# Altium PCB PCB_Quectel_M25.PcbDoc (part 2 of 2)
Units mm, origin at the board's own origin, x right, y up, seen from the top; angles counter-clockwise.
Board outline 88.9 x 63.5 mm, 2 copper layers (Top Layer, Bottom Layer), stack 1.67 mm thick; 94 components, 52 nets, 369 pads, 65 vias.
Unrouted connection lines stored in the file: 1.
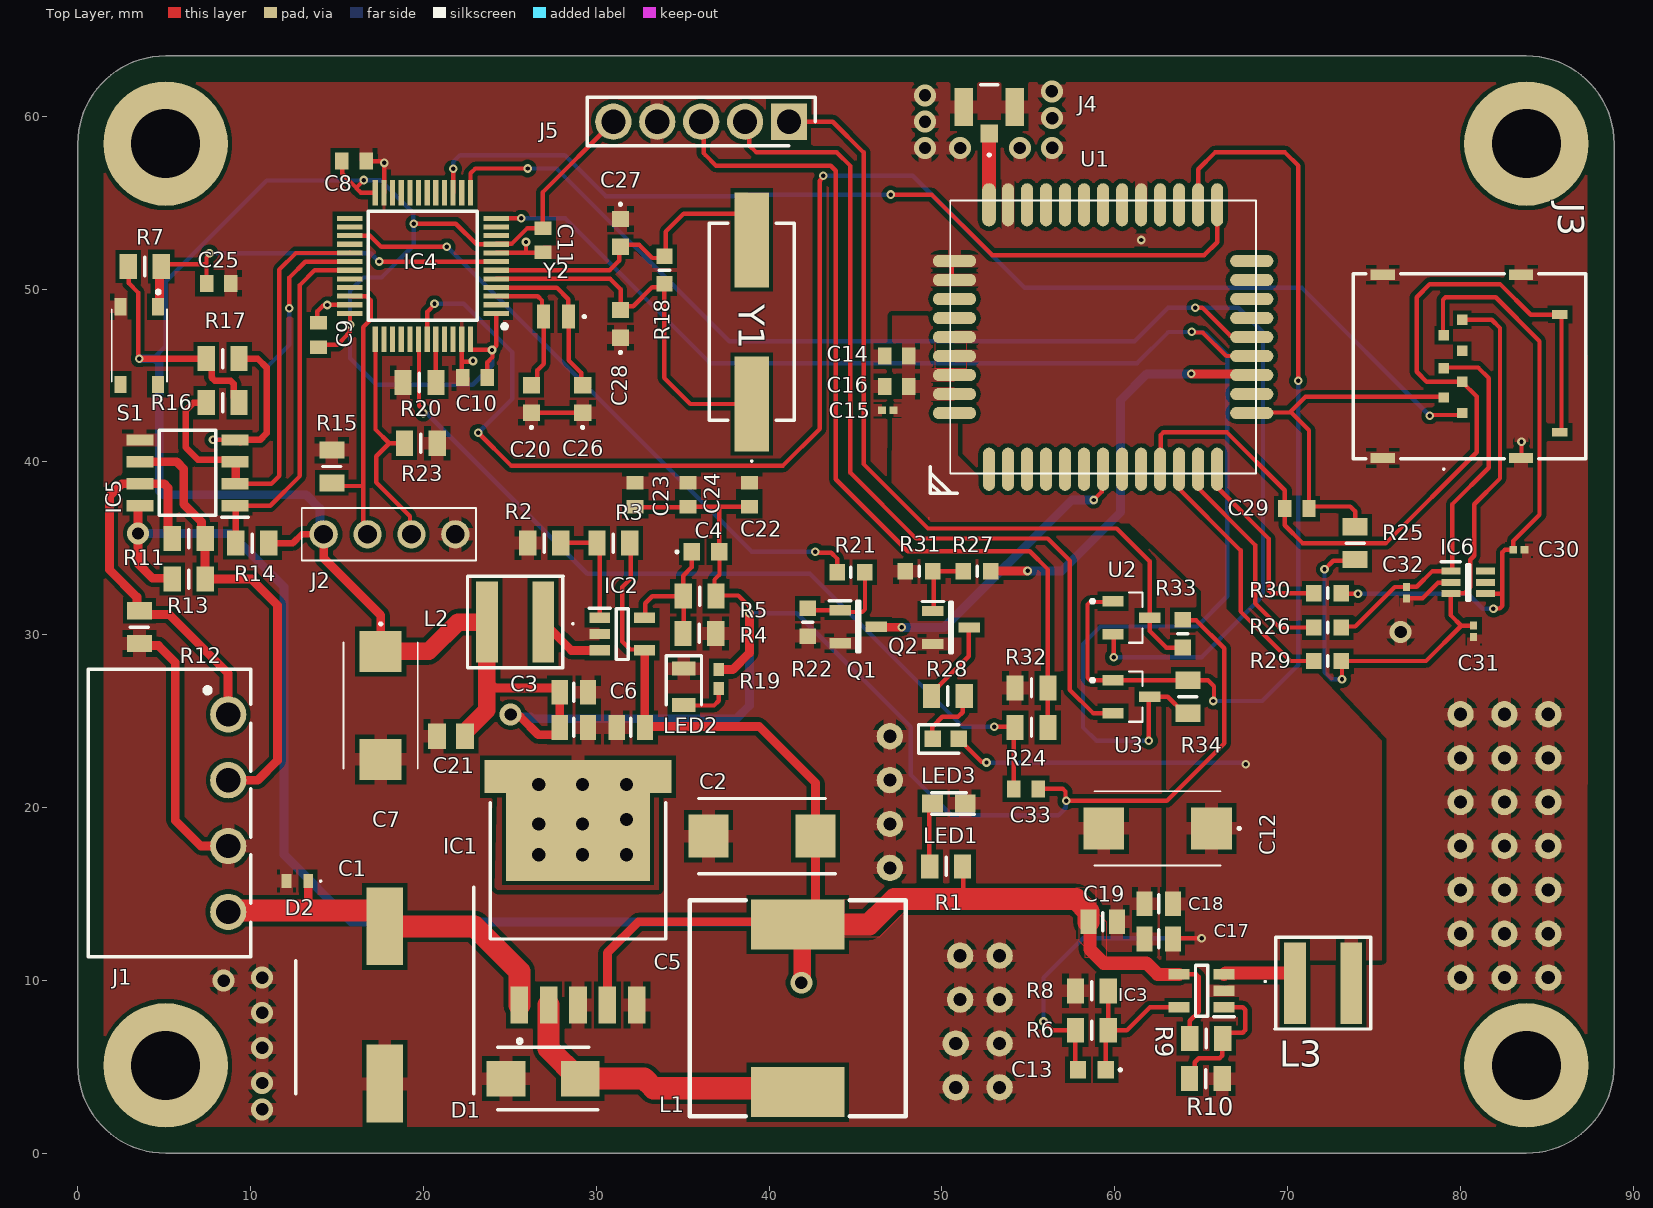
[diagram p0: Top Layer view]

## Via types
v1: diameter 0.5, hole 0.254, Top Layer to Bottom Layer, tented both sides, 47 vias
v2: diameter 1.27, hole 0.711, Top Layer to Bottom Layer, tented both sides, 18 vias

## Nets (pads, with @x,y where several pads share a name; then routed paths per layer and width w, separated by ;. In a path a pad name is that pad's centre, name@x,y a point inside that pad or via, vN(x,y) a via of type N, cw(c..) or ccw(c..) an arc to the next point about the centre after c; other vN are vias at no path point) (continued)
SIMDT: (continued)
  Top Layer w0.254: IC4.43 20.214,48.682 20.639,49.107 v1(20.639,49.15) ; v1(23.177,41.685) 25.071,39.791 40.807,39.791 42.926,41.91 42.926,56.271 43.092,56.437 43.092,56.51 v1(43.139,56.557) ; v1(78.232,42.672) 78.279,42.719 79.963,42.719 80.01,42.672 80.1,42.762 J3.CD1
  Bottom Layer w0.254: v1(20.639,49.15) 22.334,49.15 25.146,46.339 25.146,43.654 v1(23.177,41.685) ; v1(43.139,56.557) 48.309,56.557 54.796,50.07 70.834,50.07 v1(78.232,42.672)
SWDCLK: IC4.37 J2.2 R23.2 | length 14.4
  Top Layer w0.254: IC4.37 17.223,47.099 17.223,45.931 ; 17.223,45.93 17.223,41.877 18.019,41.081 ; R23.2 18.019,41.081 ; J2.2 19.223,35.895 19.223,36.864 17.272,38.815 17.272,40.333 18.019,41.081
  Bottom Layer w0.254: J2.2@19.177,36.5 19.177,35.941 J2.2
SWDIO: IC4.34 J2.3 R15.2 | length 17
  Top Layer w0.254: R15.2 14.878,38.608 16.51,38.608 ; IC4.34 15.732,49.59 16.704,49.59 16.942,49.352 16.942,48.235 16.51,47.803 16.51,38.608 ; J2.3 16.51,36.068 16.51,38.608
TX_EN: IC4.29 IC5.2 IC5.3 R16.1 | length 27
  Top Layer w0.254: IC5.2 11.204,38.737 11.659,39.192 11.659,51.13 12.618,52.09 15.721,52.09 IC4.29 ; IC5.3@9.098,39.982 IC5.3
  Top Layer w0.381: R16.1 7.414,43.416 6.673,43.416 6.239,42.982 6.239,40.839 6.946,40.132 IC5.3@8.948,40.132
  Top Layer w0.508: IC5.2 9.098,38.762 9.144,38.808 9.144,39.936 IC5.3@9.098,39.982
V_EXT: R34.2 U1.24 U2.1 U3.1 | length 57.4
  Top Layer w0.254: U2.1 59.859,31.897 58.574,31.897 58.425,31.748 58.425,27.515 58.574,27.366 U3.1 R34.2 ; R34.2@64.241,27.361 65.399,27.361 65.745,27.016 65.745,26.209 v1(65.707,26.17) ; U1.24 64.827,56.934 65.805,57.912 69.85,57.912 70.612,57.15 v1(70.612,44.704)
  Bottom Layer w0.254: v1(65.707,26.17) 68.537,26.17 70.612,28.245 v1(70.612,44.704)
VB_STM32: C3.2 C4.2 C5.2 C7.1 C8.2 C9.2 C10.2 C11.2 C21.2 C22.2 C23.2 C24.2 C33.2 IC4.1 IC4.9 IC4.24 IC4.36 IC4.48 J2.4 J5.5 L2.2 R5.2 R7.2 R14.2 R16.2 R17.2 R19.2 R33.2 | length 226.1
  Top Layer w0.254: R7.2 2.943,51.29 2.943,50.351 3.488,49.806 3.488,46.216 3.509,46.195 3.509,46.021 v1(3.556,45.974) ; C9.2 14.051,46.772 15.015,46.772 15.342,47.098 15.342,47.114 15.737,47.509 v1@15.737,47.858 ; C8.2@15.295,57.386 15.295,56.677 16.094,55.877 16.119,55.877 v1(16.553,56.311) ; IC4.36 15.748,48.574 v1(15.748,47.936) v1@15.748,47.869 ; 16.101,55.857 16.38,55.578 17.191,55.578 17.197,55.583 IC4.24 ; v1(19.438,53.788) 21.874,53.788 23.072,52.59 24.197,52.59 IC4.9 24.224,52.617 25.099,52.617 26.014,53.532 C11.2@26.894,53.532 ; IC4.48 22.714,46.52 22.737,46.497 22.881,46.497 22.886,46.491 23.957,46.491 v1(23.969,46.479) ; C10.2 23.687,45.758 23.996,46.066 23.996,46.452 23.991,46.457 24.015,46.457 24.015,46.526 24.218,46.728 IC4.1@24.218,48.595 ; C11.2 C11.2@26.894,53.532 ; J5.5 26.894,55.596 C11.2@26.894,53.532 ; C23.2 32.273,37.378 35.284,37.378 C24.2 37.122,37.4 ; C4.2 37.122,37.4 ; C4.2@37.128,34.798 37.128,33.48 36.841,33.193 36.841,32.323 R5.2 36.967,32.275 38.222,32.275 38.862,31.635 v1(38.862,31.242) ; C22.2 37.122,37.4 ; C33.2 57.003,21.082 57.151,20.933 57.151,20.435 v1(57.198,20.388) 63.015,20.388 66.342,23.715 66.342,29.213 64.724,30.831 63.967,30.831 R33.2
  Top Layer w0.381: v1(3.556,45.974) R17.2 7.742,45.664 7.742,44.89 7.927,44.704 8.837,44.704 9.023,44.518 9.023,43.743 R16.2 ; R14.2 12.446,35.306 12.954,35.814 J2.4
  Top Layer w0.508: J2.4 14.224,34.422 17.526,31.12 C7.1 ; 23.674,27.38 24.13,26.924 27.666,26.924 27.882,26.708 C3.2 C5.2@27.882,24.838 ; v2(25.049,25.385) 25.195,25.239 25.615,25.239 26.644,24.21 27.666,24.21 27.882,24.426 C5.2 ; R19.2 37.892,27.982 38.862,28.952 v1(38.862,31.242)
  Top Layer w1.016: C7.1@17.575,29.047 20.311,29.047 21.998,30.734 L2.2 ; C21.2 22.4,24.355 23.674,25.629 23.674,27.38 L2.2@23.674,30.662
  Bottom Layer w0.254: 4.361,45.974 5.08,46.693 5.08,50.433 10.934,56.287 16.529,56.287 v1(16.553,56.311) 17.508,56.311 19.4,54.419 19.4,53.826 v1(19.438,53.788) 19.438,52.534 17.577,50.673 16.51,50.673 15.748,49.911 v1(15.748,47.936) 15.748,45.999 17.286,44.461 22.854,44.461 23.991,45.598 23.991,46.457 v1(23.969,46.479) ; v1@38.87,31.25 41.605,31.25 48.205,24.65 48.205,21.89 50.537,19.558 56.739,19.558 57.168,19.987 57.168,20.358 v1(57.198,20.388)
  Bottom Layer w0.508: v1(3.556,45.974) 4.361,45.974 4.486,45.974 4.709,45.751 4.709,38.323 4.932,38.1 13.208,38.1 14.008,37.3 14.008,36.03 J2.4 ; v2(25.049,25.385) 25.195,25.239 25.653,25.239 26.192,25.239 26.284,25.147 38.101,25.147 38.862,25.908 v1(38.862,31.242)
pads on no net: IC1.7 IC1.8 IC4.2 IC4.10 IC4.11 IC4.14 IC4.16 IC4.17 IC4.18 IC4.19 IC4.20 IC4.21 IC4.22 IC4.25 IC4.26 IC4.28 IC4.32 IC4.33 IC4.38 IC4.39 IC4.40 IC4.41 IC4.45 IC4.46 IC6.5 IC6.6 J3.C6 S1.2 S1.4 U1.1 U1.2 U1.3 U1.4 U1.5 U1.6 U1.8 U1.9 U1.15 U1.19 U1.20 U1.21 U1.22 U1.25 U1.26 U1.28 U1.29 U1.30 U1.31 U1.32 U1.33 U1.38 U1.39 U1.44

## Polygon pours and split planes (outlines as drawn)
GND on Top Layer "GND_L01_P020" (solid, pour order 20): 1.488,61.976 87.351,61.976 87.376,35.762 87.351,1.524 1.488,1.524
4V on Top Layer "4V_L01_P018" (solid, pour order 18): 47.129,48.466 51.69,48.466 51.69,44.183 50.928,43.421 50.928,40.373 52.198,39.103 62.866,39.103 66.443,35.527 66.443,31.5 69.85,28.093 71.452,28.093 75.459,23.876 75.459,11.176 62.968,11.176 62.968,26.416 66.624,26.416 66.624,28.741 64.999,30.367 64.999,32.51 60.841,36.451 47.097,36.451
no net on Top Layer "NONET_L01_P019" (solid, pour order 19): 49.25,36.719 49.25,36.804 49.25,36.682 49.254,36.678
no net on Top Layer "NONET_L01_P009" (solid, pour order 9): 49.612,47.192 51.412,47.192 51.412,45.392 49.612,45.392
no net on Top Layer "NONET_L01_P005" (solid, pour order 5): 58.893,15.418 58.893,13.988 59.498,13.384 59.498,11.318 58.298,11.318 58.298,11.918 57.953,12.263 57.953,13.988 57.699,14.242 57.699,14.315 48.183,14.315 46.369,12.501 44.356,12.501 44.356,14.682
no net on Top Layer "NONET_L01_P001" (solid, pour order 1): 34.599,22.86 34.599,20.581 33.618,20.581 33.618,15.247 24.272,15.247 24.127,15.392 24.272,20.581 23.975,20.581 23.291,20.581 23.291,22.86
GND on Bottom Layer "GND_L02_P016" (solid, pour order 16): 1.488,31.749 1.49,61.976 87.376,61.976 87.376,1.524 1.49,1.524

## Silkscreen, mask and mechanical layers (free items; w line width, h text height)
Mechanical 1:
  the board outline again, w0.508